# EAGLE board PN532_Shield (EAGLE 9.3.0)
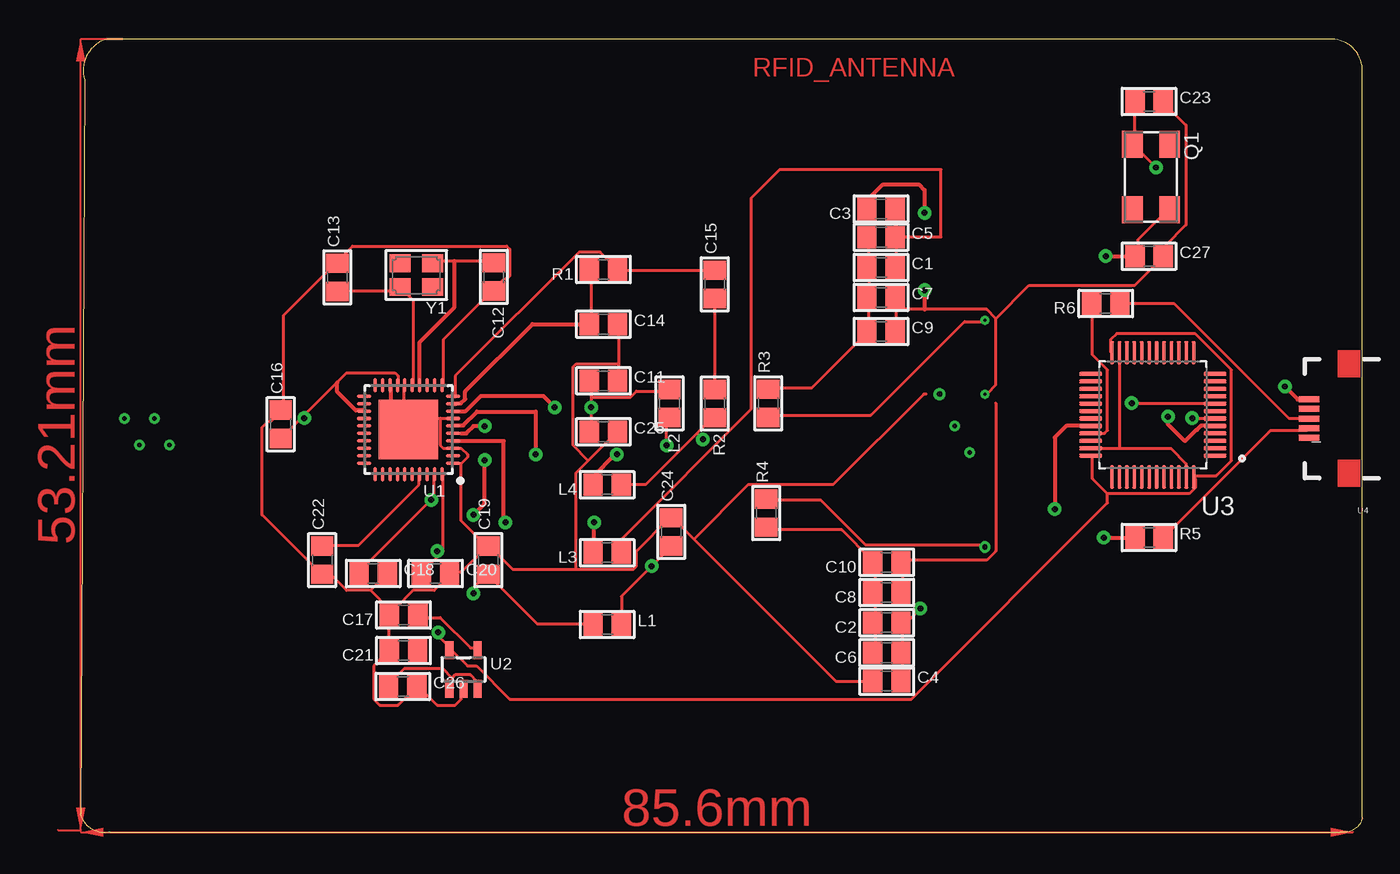
[diagram p0: board, top side]
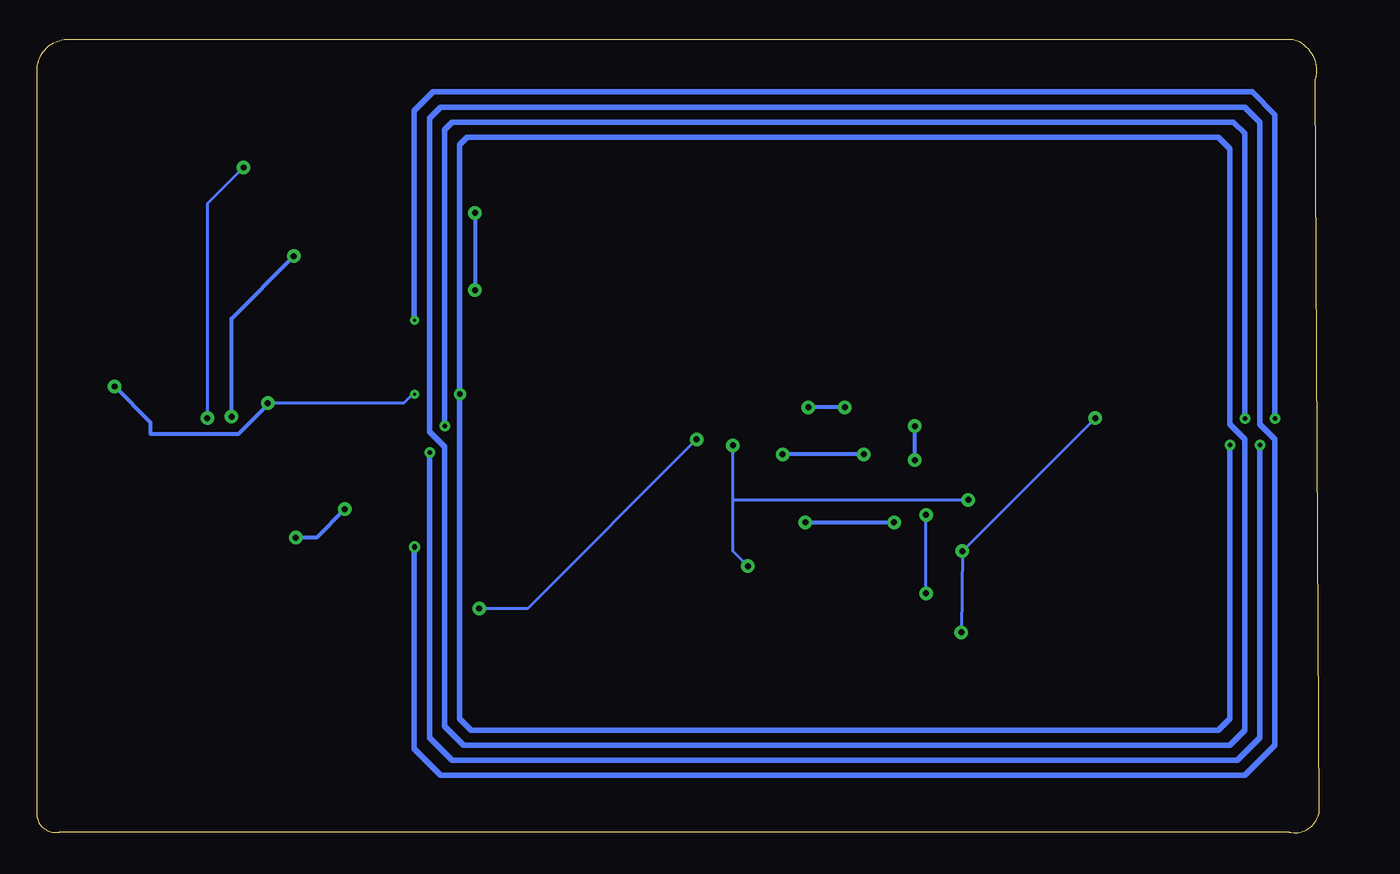
[diagram p1: board, bottom side, seen from below]

Size 86.23 x 53.39 mm. Coordinates in mm from the lower left corner, seen from the top.
Outline: 1.98,0.04 84.74,0.04 arc90 86.23,1.01 86.23,51.4 arc90 83.98,53.38 1.73,53.38 arc90 0.25,50.64 0,1.27 arc90 1.98,0.04
Copper layers (1+16): Top 0.035mm / dielectric 1.5mm / Bottom 0.035mm
Design rules "default": minimum track width 8mil, minimum drill 0.4mm, track to track 8mil, track to pad 8mil, pad to pad 8mil, via to via 8mil, smd to smd 8mil, copper to edge 20mil, drill to drill 8mil, minimum pad ring 8mil, minimum via ring 10mil, stop-mask expansion 3mil, vias tented up to drill 20mil, thermal gap 8mil

## Footprints (pad centres in the part's own frame; a part is rotated, then mirrored left to right if it is on the bottom)
0805 = smd 1.3 x 1.5: 1 -0.95,0; 2 0.95,0
ANTENNA = drill 0.3: CONN1_1 -29.337,2.159; CONN1_2 -28.321,0.381; CONN2_1 -27.305,2.159; CONN2_2 -26.289,0.381; CONN3_1 26.543,1.651; CONN3_2 27.559,-0.127 | drill 0.35: LEFT_PIN 28.575,-6.477 | drill 0.2: MIDDLE_PIN 28.575,3.81; RIGHT_PIN 28.575,8.763 | drill 0.35 pad 0.813: MIDDLE_PIN_1 25.527,3.81
6.0X3.5_4 = smd 1.8 x 1.4: 1 -2.2,-1.25; 2 2.2,-1.25; 3 2.2,1.25; 4 -2.2,1.25
HVQFN40-6X6 = smd 1 x 0.25: 1 -2.99,2.25; 2 -2.99,1.75; 3 -2.99,1.25; 4 -2.99,0.75; 5 -2.99,0.25; 6 -2.99,-0.25; 7 -2.99,-0.75; 8 -2.99,-1.25; 9 -2.99,-1.75; 10 -2.99,-2.25; 21 2.99,-2.25; 22 2.99,-1.75; 23 2.99,-1.25; 24 2.99,-0.75; 25 2.99,-0.25; 26 2.99,0.25; 27 2.99,0.75; 28 2.99,1.25; 29 2.99,1.75; 30 2.99,2.25 | smd 0.25 x 1: 11 -2.25,-2.99; 12 -1.75,-2.99; 13 -1.25,-2.99; 14 -0.75,-2.99; 15 -0.25,-2.99; 16 0.25,-2.99; 17 0.75,-2.99; 18 1.25,-2.99; 19 1.75,-2.99; 20 2.25,-2.99; 31 2.25,2.99; 32 1.75,2.99; 33 1.25,2.99; 34 0.75,2.99; 35 0.25,2.99; 36 -0.25,2.99; 37 -0.75,2.99; 38 -1.25,2.99; 39 -1.75,2.99; 40 -2.25,2.99 | smd 4 x 4: TP 0,0
SOT23-5 = smd 0.55 x 1.2: 1 -0.95,-1.3; 2 0,-1.3; 3 0.95,-1.3; 4 0.95,1.3; 5 -0.95,1.3
QFP50P900X900X160-48N = smd 1.56 x 0.28: 1 -4.18,2.75; 2 -4.18,2.25; 3 -4.18,1.75; 4 -4.18,1.25; 5 -4.18,0.75; 6 -4.18,0.25; 7 -4.18,-0.25; 8 -4.18,-0.75; 9 -4.18,-1.25; 10 -4.18,-1.75; 11 -4.18,-2.25; 12 -4.18,-2.75; 25 4.18,-2.75; 26 4.18,-2.25; 27 4.18,-1.75; 28 4.18,-1.25; 29 4.18,-0.75; 30 4.18,-0.25; 31 4.18,0.25; 32 4.18,0.75; 33 4.18,1.25; 34 4.18,1.75; 35 4.18,2.25; 36 4.18,2.75 | smd 0.28 x 1.56: 13 -2.75,-4.18; 14 -2.25,-4.18; 15 -1.75,-4.18; 16 -1.25,-4.18; 17 -0.75,-4.18; 18 -0.25,-4.18; 19 0.25,-4.18; 20 0.75,-4.18; 21 1.25,-4.18; 22 1.75,-4.18; 23 2.25,-4.18; 24 2.75,-4.18; 37 2.75,4.18; 38 2.25,4.18; 39 1.75,4.18; 40 1.25,4.18; 41 0.75,4.18; 42 0.25,4.18; 43 -0.25,4.18; 44 -0.75,4.18; 45 -1.25,4.18; 46 -1.75,4.18; 47 -2.25,4.18; 48 -2.75,4.18
USB-MICRO-SMD = smd 1.4 x 0.4: D+1 2.7,0; D-1 2.7,0.65; GND1 2.7,-1.3; ID1 2.7,-0.65; VBUS1 2.7,1.3
CRYSTAL_3.2X2.5 = smd 1.4 x 1.2: 1 -1.1,-0.8; 2 1.1,0.8; GND1 -1.1,0.8; GND2 1.1,-0.8

## Placement (x,y rotation side)
C1  22pF  [0805]  53.85,38.03 0 top
C2  22pF  [0805]  54.23,14.13 180 top
C3  220pF  [0805]  53.85,41.96 180 top
C4  220pF  [0805]  54.23,10.2 0 top
C5  NC  [0805]  53.85,40.06 0 top
C6  NC  [0805]  54.23,12.1 180 top
C7  100pF  [0805]  53.85,36 0 top
C8  100pF  [0805]  54.23,16.16 180 top
C9  NC  [0805]  53.85,33.72 0 top
C10  NC  [0805]  54.23,18.19 180 top
C11  0.1µF  [0805]  35.16,30.4 0 top
C12  33pF  [0805]  27.78,37.39 270 top
C13  33pF  [0805]  17.27,37.35 90 top
C14  0.1µF  [0805]  35.17,34.2 0 top
C15  1000pF  [0805]  42.66,36.89 90 top
C16  0.1µF  [0805]  13.45,27.48 90 top
C17  0.1µF  [0805]  21.72,14.65 180 top
C18  10µF  [0805]  19.67,17.44 0 top
C19  10µF  [0805]  27.41,18.33 90 top
C20  0.1µF  [0805]  23.86,17.44 0 top
C21  10µF  [0805]  21.71,12.26 180 top
C22  10µF  [0805]  16.24,18.33 90 top
C23  33pF  [0805]  71.88,49.19 0 top
C24  0.1µF  [0805]  39.73,20.24 90 top
C25  10µF  [0805]  35.16,26.97 0 top
C26  10µF  [0805]  21.66,9.83 0 top
C27  33pF  [0805]  71.88,38.78 0 top
L1  FERRITE  [0805]  35.42,14.01 0 top
L2  FERRITE  [0805]  39.61,28.87 270 top
L3  560nH  [0805]  35.42,18.84 180 top
L4  560nH  [0805]  35.42,23.41 180 top
L5  RFID_ANTENNA  [ANTENNA]  32.26,25.7 0 top
Q1  [6.0X3.5_4]  72.01,44.11 270 top
R1  1.0K  [0805]  35.17,37.88 180 top
R2  1.69K  [0805]  42.66,28.87 270 top
R3  1.5  [0805]  46.25,28.88 90 top
R4  1.5  [0805]  46.12,21.5 90 top
R5  1.0K  [0805]  71.88,19.86 0 top
R6  1.0K  [0805]  68.96,35.6 180 top
U1  PN532  [HVQFN40-6X6]  22.05,27.11 180 top
U2  ADP122(3.3V)  [SOT23-5]  25.75,10.98 0 top
U3  STM32F103C8T6  [QFP50P900X900X160-48N]  72.14,28.11 180 top
U4  [USB-MICRO-SMD]  85.34,27.86 180 top
Y1  27.12MHz  [CRYSTAL_3.2X2.5]  22.57,37.51 180 top

## Library data of the parts
C1-C27 L1-L4 R1-R6 U1 U2 Y1 = microbuilder
L5 = antenna
Q1 = crystal-geyer_V1_0
U3 = STM32F103C8T6; AVAILABILITY: Unavailable; DESCRIPTION: Mainstream Performance line, ARM Cortex-M3 MCU with 64 Kbytes Flash, 72 MHz CPU, motor control, USB and CAN; MF: STMicroelectronics; MP: STM32F103C8T6; PACKAGE: LQFP-48 STMicroelectronics; PRICE: None
U4 = MicroUSB

## Nets
5.0V: C26.1 U2.1 U2.3
+5V: U4.VBUS1
GND: C4.1 C11.2 C12.2 C13.2 C14.2 C16.2 C17.2 C18.2 C19.2 C20.2 C21.2 C22.1 C24.2 C25.2 C26.2 U1.1 U1.3 U1.7 U1.11 U1.16 U1.18 U1.TP U2.2
MISO: U1.29
MOSI/SDA/TX: U1.28
N$1: L3.2 U1.4
N$2: U1.6
N$3: C1.2 C3.1 C5.2 L3.1
N$4: L5.RIGHT_PIN R3.1
N$5: L5.LEFT_PIN R4.2
N$6: R5.1 U3.32
N$7: C12.1 U1.14 Y1.1
N$8: C13.1 U1.15 Y1.2
N$9: C15.1 R2.1
N$10: C14.1 R1.2 U1.9
N$11: C15.2 R1.1 U1.10
N$12: C2.1 C4.2 C6.1 L4.1 R2.2
N$13: C11.1 C25.1 L2.1 U1.8
N$14: C19.1 L1.1 U1.5
N$15: R6.2 U3.33
N$16: R5.2 U4.D-1
N$17: R6.1 U4.D+1
N$20: C27.1 Q1.3 U3.5
N$21: C23.1 Q1.1 U3.6
N$54: C17.1 U2.4
N$55: C22.2 U1.37
NSS/SCL/RX: U1.27
S$1: C3.2 C7.2 C9.2 C23.2 C27.2
S$2: U3.8
S$3: C8.1 C10.1
TX1_ANTENNA: C1.1 C5.1 C7.1 C9.1 R3.2
TX2_ANTENNA: C2.2 C6.2 C8.2 C10.2 R4.1
VCC: C18.1 C24.1 L1.2 L2.2 U1.39
VDD: C16.1 C20.1 U1.17 U1.23 U1.40 U2.5 U3.24 U3.36 U3.48
VDDA: U3.9
VSS: U3.23 U3.35 U3.47

## Tracks (layer width: path | path; a pad name or v marks a point on that pad's centre or on a via)
5.0V
  Top 0.203: 24.99,10.41 24.99,9.8 U2.1 | 24.99,10.41 25.2,10.61 26.21,10.61 26.62,10.2 26.62,9.8 U2.3 | 24.99,10.41 24.38,11.02 21.74,11.02 20.73,10 C26.1
GND
  Top 0.203: U1.11 24.38,30.12 24.38,33.17 27.64,36.42 C12.2 27.84,36.62 28.45,37.23 28.65,37.23 28.85,37.43 28.85,39.26 28.65,39.46 18.29,39.46 17.27,38.45 C13.2 17.07,38.25 13.61,34.79 13.61,28.49 C16.2 13.41,28.29 12.8,27.68 12.6,27.68 12.19,27.27 12.19,21.38 16.05,17.52 C22.1 16.26,17.32 16.87,17.32 17.88,16.3 19.51,16.3 | U2.2 25.6,9.59 25.6,8.98 25.2,8.58 23.98,8.58 22.76,9.8 C26.2 22.55,9.8 21.34,8.58 20.12,8.58 19.71,8.98 19.71,11.22 20.73,12.24 C21.2 20.73,12.44 20.73,14.47 C17.2 | 19.51,16.3 20.52,17.32 C18.2 | 20.73,15.08 20.73,14.67 C17.2 | 19.51,16.3 20.73,15.08 | 25.6,24.83 25.2,24.83 U1.1 | 25.6,24.83 26.01,25.24 26.01,25.44 25.6,25.85 25.2,25.85 U1.3 24.99,25.85 24.38,25.85 24.18,26.05 24.18,27.88 | 21.74,27.88 21.74,27.48 21.95,27.27 U1.TP 21.74,27.88 | 21.74,27.88 21.74,28.62 21.74,29.91 U1.16 | 21.74,27.88 24.18,27.88 | 24.18,27.88 24.99,27.88 U1.7 | 36.17,31.54 36.17,34.18 C14.2 | 36.17,31.54 36.17,30.52 C11.2 | C19.2 27.23,19.14 25.6,17.52 24.99,17.52 C20.2 24.79,17.32 23.77,16.3 22.35,16.3 21.13,15.08 20.73,15.08 | 33.33,17.72 29.06,17.72 27.43,19.35 C19.2 | 33.33,17.72 37.19,17.72 37.39,17.93 37.39,18.94 39.62,21.18 C24.2 39.83,21.18 41.25,19.75 | 41.25,19.75 50.8,10.2 53.24,10.2 C4.1 | 34.14,25.04 33.33,24.22 33.33,17.72 | 34.14,25.04 35.97,26.87 C25.2 | 36.17,31.54 33.33,31.54 33.12,31.34 33.12,26.05 34.14,25.04 | 25.6,24.83 25.6,20.97 27.23,19.35 C19.2 | 20.73,15.08 C17.2 | 56.9,29.51 56.72,29.51 50.62,23.41 44.91,23.41 41.25,19.75
  Top 0.254: U1.18 20.83,30.08 20.83,28.49 21.61,28.49 21.74,28.62
N$1  (via drill 0.4)
  Top 0.254: U1.4 28.42,26.36 28.45,26.33 28.45,21 v28.57,20.87 | L3.2 34.54,18.92 v34.54,20.87
  Bottom 0.254: v34.54,20.87 v28.57,20.87
N$2  (via drill 0.4)
  Top 0.254: U1.6 25.09,27.41 25.73,27.41 26.65,28.33 30.61,28.33 v30.61,25.44 | v36.07,25.44 35.94,25.44 34.42,23.92
  Bottom 0.254: v30.61,25.44 v36.07,25.44
N$3
  Top 0.203: L3.1 36.37,18.94 36.37,19.75 45.11,28.49 45.11,42.69 47.02,44.6 57.89,44.6 57.89,40.07 54.86,40.07 C5.2 54.86,39.87 54.86,38.04 C1.2
  Top 0.254: C3.1 54.8,39.93 54.86,39.87
N$4
  Top 0.203: L5.RIGHT_PIN 60.76,34.38 59.46,34.38 53.16,28.09 46.33,28.09 R3.1
N$5
  Top 0.203: 60.76,19.35 52.83,19.35 49.78,22.4 46.13,22.4 R4.2
  Top 0.254: L5.LEFT_PIN 60.76,19.3 60.76,19.35
N$6  (via drill 0.4)
  Top 0.254: U3.32 66.31,27.36 65.53,26.59 v65.53,21.76 | v68.83,19.86 R5.1
  Bottom 0.254: v65.53,21.76 67.44,19.86 v68.83,19.86
N$7
  Top 0.203: Y1.1 23.77,38.45 25.15,38.45 27.64,38.45 C12.1
  Top 0.254: U1.14 22.8,33 25.15,35.35 25.15,38.45
N$8
  Top 0.203: U1.15 22.35,30.12 22.35,35.81 21.54,36.62 Y1.2 21.34,36.62 21.13,36.42 17.27,36.42 C13.1
N$9
  Top 0.203: C15.1 42.67,35.81 42.67,29.91 R2.1
N$10
  Top 0.203: C14.1 34.34,34.38 34.34,37.84 R1.2
  Top 0.254: C14.1 30.38,34.2 25.87,29.69 25.87,29.17 25.57,28.87 25.29,28.87 25.21,28.84 25.15,28.86 U1.9
N$11
  Top 0.203: U1.10 25.2,29.3 25.2,30.73 33.53,39.06 34.95,39.06 35.97,38.04 R1.1 36.17,37.84 42.47,37.84 C15.2
N$12  (via drill 0.4)
  Top 0.203: C4.2 55.27,10.2 55.27,12.03 C6.1 55.27,12.24 55.27,14.06 C2.1 55.27,14.27 55.68,14.27 v56.49,15.08 | L4.1 38,23.41 41.45,26.87 | 41.45,26.87 42.47,27.88 R2.2 | 41.45,26.87 v41.86,26.46
  Bottom 0.203: v56.49,15.08 53.24,15.08 v41.86,26.46
N$13  (via drill 0.4)
  Top 0.203: 34.34,29.3 34.34,30.32 C11.1 | 34.34,29.3 v34.34,28.62 34.34,27.07 C25.1 | 34.34,29.3 36.98,29.3 37.39,29.71 39.42,29.71 L2.1
  Top 0.254: U1.8 25.91,28.36 26.92,29.38 31.11,29.38 v31.88,28.62
  Bottom 0.254: v31.88,28.62 v34.34,28.62
N$14  (via drill 0.4)
  Top 0.203: 25.6,26.87 25.2,26.87 U1.5 | v26.42,16.1 26.42,16.5 27.23,17.32 C19.1 27.43,17.32 30.68,14.06 34.34,14.06 L1.1
  Top 0.254: 25.6,26.87 25.93,26.87 26.42,27.35 v27.18,27.35 | v26.42,21.38 27.18,22.14 v27.18,25.06
  Bottom 0.203: v26.42,16.1 v26.42,21.38
  Bottom 0.254: v27.18,25.06 v27.18,27.35
N$15
  Top 0.203: R6.2 68.07,35.6 68.07,32.15 69.09,31.13 69.09,27.07 68.89,26.87 68.07,26.87 U3.33
N$16
  Top 0.203: U4.D-1 82.5,27.07 80.06,27.07 R5.2
N$17
  Top 0.203: R6.1 73.56,35.6 81.28,27.88 82.5,27.88 U4.D+1
N$20  (via drill 0.4)
  Top 0.203: C27.1 71.12,38.85 71.12,39.87 73.15,41.9 Q1.3
  Top 0.254: U3.5 76.82,27.36 76.85,27.33 76.96,27.33 76.93,27.36 U3.5 | U3.5 75.36,27.36 75.1,27.1 75.06,27.1 74.3,26.33 73.15,27.48 v73.15,27.98 | v68.96,38.78 C27.1
  Bottom 0.254: v73.15,27.98 73.15,34.59 v68.96,38.78
N$21  (via drill 0.4)
  Top 0.203: C23.1 70.92,49.01 70.92,46.37 Q1.1 70.92,46.17 v72.34,44.75 | v74.78,27.88 76.2,27.88 U3.6
  Bottom 0.203: v74.78,27.88 74.78,42.31 v72.34,44.75
N$54
  Top 0.203: U2.4 26.62,12.44 26.21,12.44 24.18,14.47 22.76,14.47 C17.1
N$55
  Top 0.203: U1.37 22.76,24.02 22.76,23.41 18.69,19.35 16.26,19.35 C22.2
S$1  (via drill 0.4)
  Top 0.203: C23.2 72.95,49.01 74.37,47.59 74.37,40.89 72.95,39.46 72.95,38.85 C27.2 72.75,38.65 70.92,36.82 63.8,36.82 61.57,34.59 | C9.2 54.86,33.77 54.86,35.2 | C7.2 54.86,35.81 54.86,35.2 | 54.86,35.2 56.77,35.2 60.96,35.2 61.57,34.59 | 61.57,34.59 61.57,30.12 61.02,29.57 | 60.96,29.51 61.02,29.57 | 61.02,29.57
  Top 0.254: C3.2 52.9,42.53 53.98,43.6 56.39,43.6 56.77,43.22 v56.77,41.7 | v56.77,36.49 56.77,35.2
  Bottom 0.254: v56.77,41.7 v56.77,36.49
S$2  (via drill 0.4)
  Top 0.203: U3.8 76.2,28.9 v70.71,28.9
  Top 0.254: 81.89,29.16 v81.03,30.02
  Bottom 0.203: v70.71,28.9 70.61,28.9 62.48,28.9 61.57,28.9 60.96,29.51
  Bottom 0.254: v81.03,30.02 78.61,27.6 78.61,26.84 72.67,26.84 70.61,28.9
S$3
  Top 0.203: 61.57,28.9 61.57,18.94 60.96,18.33 55.27,18.33 C10.1 55.27,18.13 55.27,16.3 C8.1
TX1_ANTENNA
  Top 0.203: C5.1 53.03,39.87 53.03,38.04 C1.1 53.03,37.84 53.03,36.01 C7.1 53.03,35.81 53.03,33.77 C9.1 52.83,33.57 49.17,29.91 46.33,29.91 R3.2
TX2_ANTENNA
  Top 0.203: C6.2 53.44,12.24 53.44,14.06 C2.2 53.44,14.27 53.44,16.1 C8.2 53.44,16.3 53.44,18.13 C10.2 53.24,18.33 51.21,20.36 46.13,20.36 R4.1
VCC  (via drill 0.4)
  Top 0.203: U1.39 23.77,24.02 23.77,22.6 v23.57,22.4 18.69,17.52 C18.1 | L1.2 36.37,14.06 36.37,15.89 v38.41,17.93 39.62,19.14 C24.1 | v39.42,26.05 39.42,27.88 L2.2
  Bottom 0.203: 39.42,22.4 39.42,18.94 v38.41,17.93 | 39.42,22.4 v39.42,26.05 | 39.42,22.4 v23.57,22.4
VDD  (via drill 0.4)
  Top 0.203: 69.09,22.8 68.07,23.82 68.07,25.24 U3.36 | 69.09,22.8 74.57,22.8 74.98,23.21 74.98,23.82 U3.48 74.98,24.02 76.4,24.02 77.42,25.04 77.42,31.13 74.98,33.57 69.7,33.57 69.29,33.17 69.29,32.35 U3.24 | 15.04,28.09 13.61,26.66 C16.1 | 15.04,28.09 17.25,30.29 17.88,30.93 21.13,30.93 21.34,30.73 21.34,30.12 U1.17 | v24.05,13.48 23.98,13.33 24.92,12.38 U2.5 24.99,12.24 26.01,11.22 26.62,11.22 28.85,8.98 55.88,8.98 69.09,22.19 69.09,22.8 | 24.18,18.74 22.96,17.52 C20.1 | 24.18,18.74 24.38,18.94 24.38,24.02 U1.40 | 24.18,18.74 v23.98,18.94 | v15.04,27.88 15.04,28.09
  Top 0.254: U1.23 19.02,28.41 18.5,28.41 17.25,29.66 17.25,30.29
  Bottom 0.203: v24.05,13.48 v23.98,18.94 v15.04,27.88
VSS
  Top 0.203: 69.9,25.85 68.07,25.85 U3.35 | 69.9,25.85 73.36,25.85 74.37,24.83 74.37,24.02 U3.47 | 69.9,25.85 69.9,32.15 U3.23
(copper drawn outside any net)
  shapes: Top area x2